# EAGLE board 2xBoard (EAGLE 9.2.2)
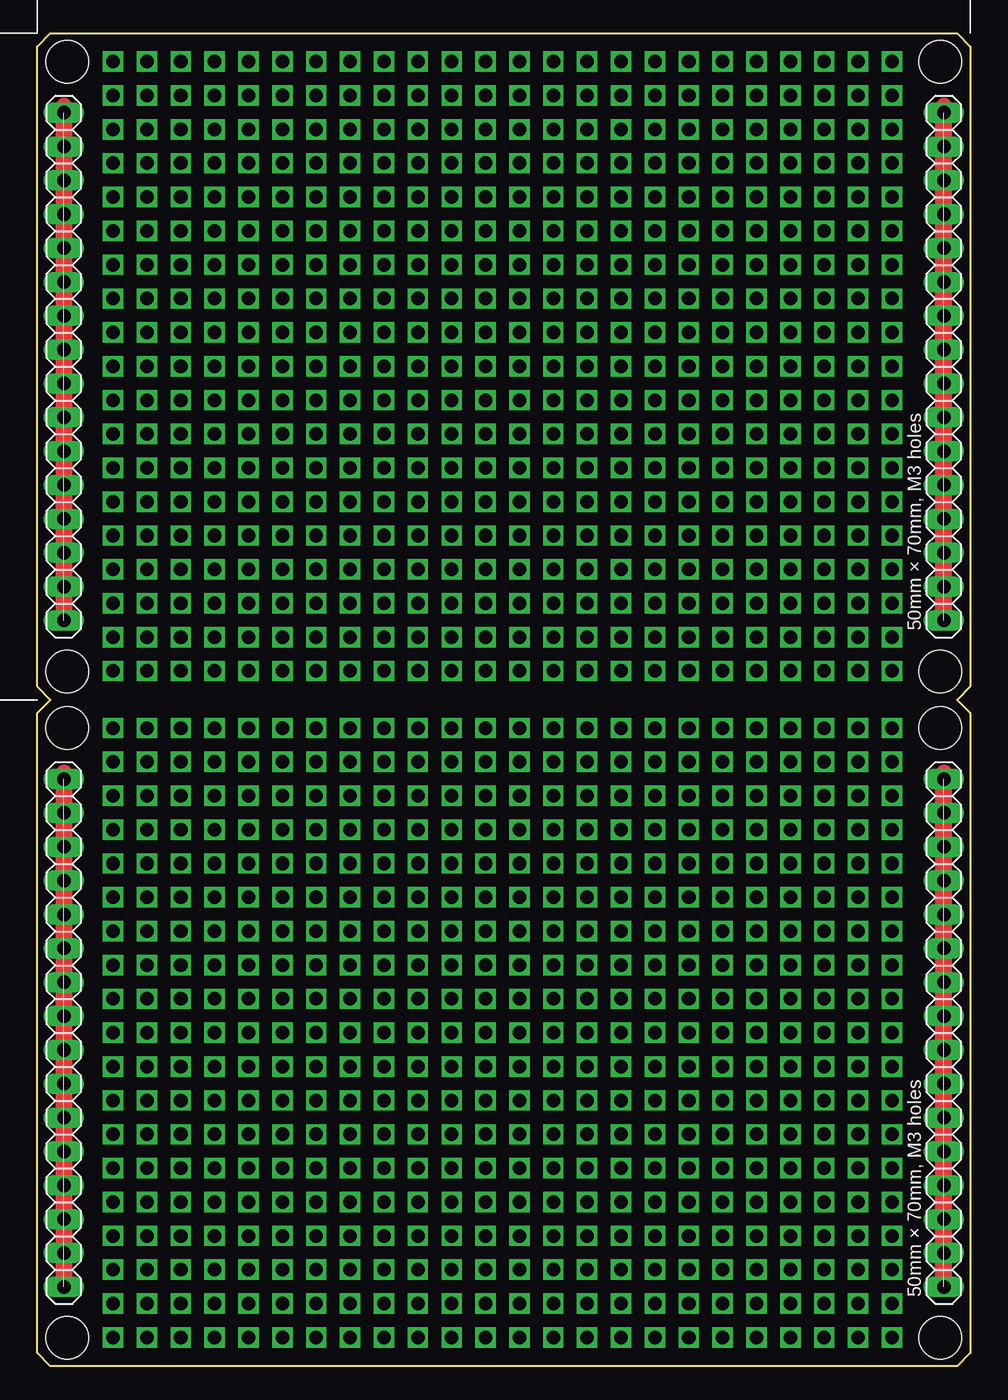
[diagram p0: board, top side]
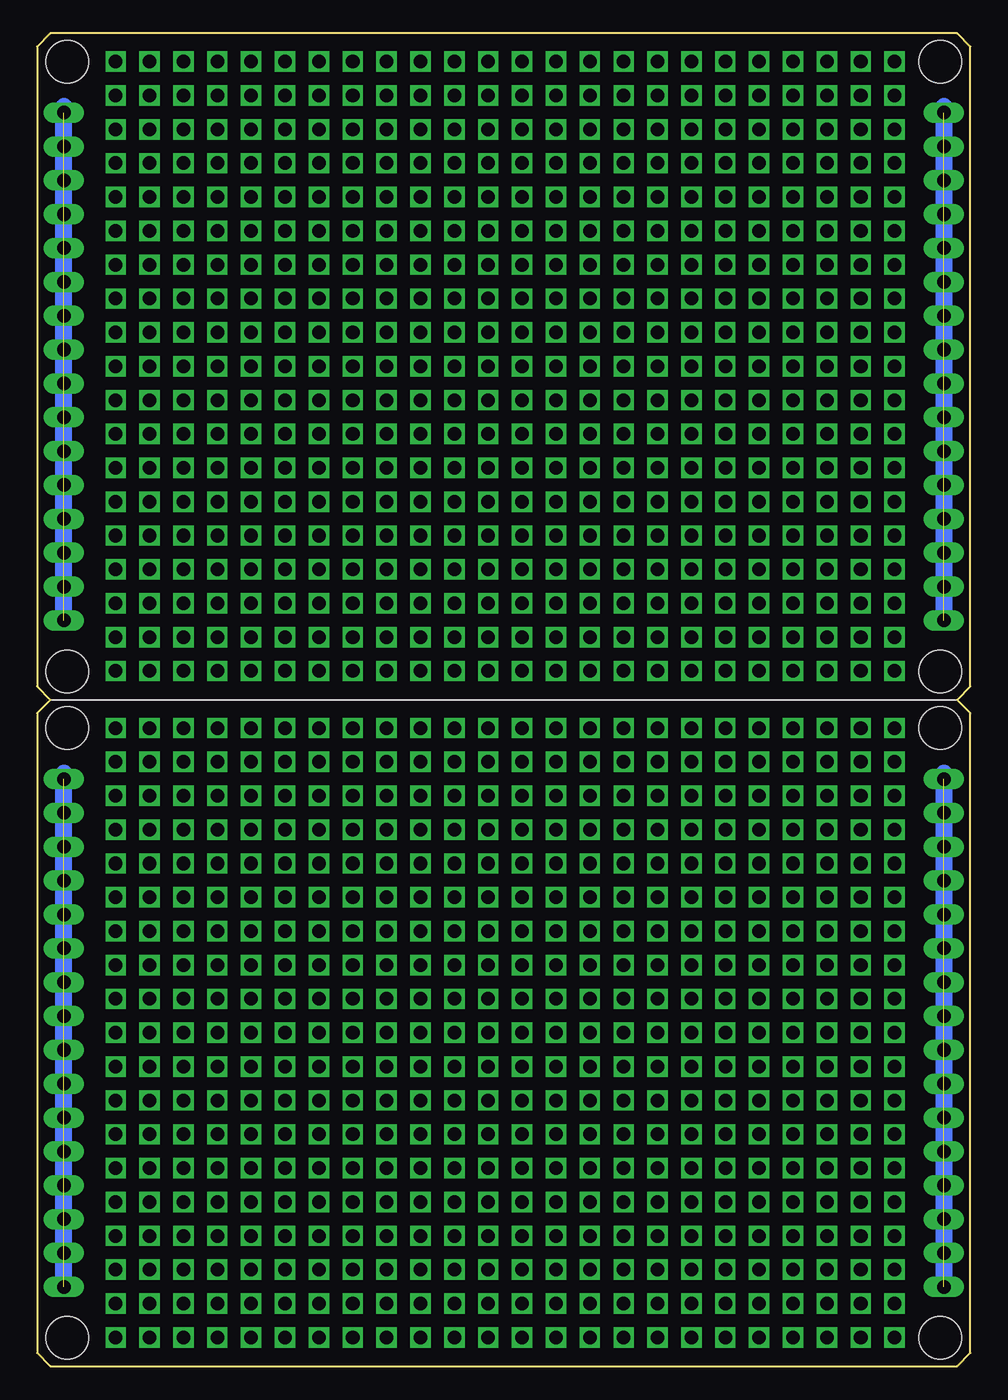
[diagram p1: board, bottom side, seen from below]

Size 70 x 100 mm. Coordinates in mm from the lower left corner, seen from the top.
Outline: 0,51 0,99 1,100 69,100 70,99 70,51 69,50 70,49 70,1 69,0 1,0 0,1 0,49 1,50 0,51
Copper layers (1*16): Top 0.035mm / dielectric 1.5mm / Bottom 0.035mm
Design rules "default *": minimum track width 6mil, minimum drill 0.35mm, track to track 6mil, track to pad 6mil, pad to pad 6mil, via to via 6mil, smd to smd 6mil, copper to edge 10mil, drill to drill 6mil, minimum pad ring 10mil, minimum via ring 8mil, stop-mask expansion 4mil, vias tented up to drill 0mil, thermal gap 10mil
Net classes: 0 default: width 0.305 mm; 1 thick: width 1.27 mm
Holes 3.2 mm at 67.75,97.87 67.75,52.13 2.25,97.87 2.25,52.13 67.75,47.87 67.75,2.13 2.25,47.87 2.25,2.13

## Footprints (pad centres in the part's own frame; a part is rotated, then mirrored left to right if it is on the bottom)
1X16 = drill 1.016 long: 1 -19.05,0; 2 -16.51,0; 3 -13.97,0; 4 -11.43,0; 5 -8.89,0; 6 -6.35,0; 7 -3.81,0; 8 -1.27,0; 9 1.27,0; 10 3.81,0; 11 6.35,0; 12 8.89,0; 13 11.43,0; 14 13.97,0; 15 16.51,0; 16 19.05,0

## Placement (x,y rotation side)
JP1  [1X16]  68,25 90 top
JP2  [1X16]  2,25 90 top
JP3  [1X16]  68,75 90 top
JP4  [1X16]  2,75 90 top

## Library data of the parts
JP1-JP4 = pinhead_v2

## Nets
SIDE1 [thick]: JP4.1 JP4.2 JP4.3 JP4.4 JP4.5 JP4.6 JP4.7 JP4.8 JP4.9 JP4.10 JP4.11 JP4.12 JP4.13 JP4.14 JP4.15 JP4.16
SIDE2 [thick]: JP3.1 JP3.2 JP3.3 JP3.4 JP3.5 JP3.6 JP3.7 JP3.8 JP3.9 JP3.10 JP3.11 JP3.12 JP3.13 JP3.14 JP3.15 JP3.16
SIDE3 [thick]: JP2.1 JP2.2 JP2.3 JP2.4 JP2.5 JP2.6 JP2.7 JP2.8 JP2.9 JP2.10 JP2.11 JP2.12 JP2.13 JP2.14 JP2.15 JP2.16
SIDE4 [thick]: JP1.1 JP1.2 JP1.3 JP1.4 JP1.5 JP1.6 JP1.7 JP1.8 JP1.9 JP1.10 JP1.11 JP1.12 JP1.13 JP1.14 JP1.15 JP1.16

## Tracks (layer width: path | path; a pad name or v marks a point on that pad's centre or on a via)
S$1
  Top 1.27: 2,94.5 2,56.5
S$2
  Top 1.27: 68,56.5 68,94.5
S$3
  Bottom 1.27: 2,94.5 2,56.5
S$4
  Bottom 1.27: 68,56.5 68,94.5
S$5  (via drill 1.02)
  other vias: 5.69,97.88
S$6  (via drill 1.02)
  other vias: 5.69,95.34
S$7  (via drill 1.02)
  other vias: 5.69,92.8
S$8  (via drill 1.02)
  other vias: 5.69,90.26
S$9  (via drill 1.02)
  other vias: 5.69,87.72
S$10  (via drill 1.02)
  other vias: 5.69,85.18
S$11  (via drill 1.02)
  other vias: 5.69,82.64
S$12  (via drill 1.02)
  other vias: 5.69,80.1
S$13  (via drill 1.02)
  other vias: 5.69,77.56
S$14  (via drill 1.02)
  other vias: 5.69,75.02
S$15  (via drill 1.02)
  other vias: 5.69,72.48
S$16  (via drill 1.02)
  other vias: 5.69,69.94
S$17  (via drill 1.02)
  other vias: 5.69,67.4
S$18  (via drill 1.02)
  other vias: 5.69,64.86
S$19  (via drill 1.02)
  other vias: 5.69,62.32
S$20  (via drill 1.02)
  other vias: 5.69,59.78
S$21  (via drill 1.02)
  other vias: 5.69,57.24
S$22  (via drill 1.02)
  other vias: 5.69,54.7
S$23  (via drill 1.02)
  other vias: 5.69,52.16
S$24  (via drill 1.02)
  other vias: 8.23,97.88
S$25  (via drill 1.02)
  other vias: 8.23,95.34
S$26  (via drill 1.02)
  other vias: 8.23,92.8
S$27  (via drill 1.02)
  other vias: 8.23,90.26
S$28  (via drill 1.02)
  other vias: 8.23,87.72
S$29  (via drill 1.02)
  other vias: 8.23,85.18
S$30  (via drill 1.02)
  other vias: 8.23,82.64
S$31  (via drill 1.02)
  other vias: 8.23,80.1
S$32  (via drill 1.02)
  other vias: 8.23,77.56
S$33  (via drill 1.02)
  other vias: 8.23,75.02
S$34  (via drill 1.02)
  other vias: 8.23,72.48
S$35  (via drill 1.02)
  other vias: 8.23,69.94
S$36  (via drill 1.02)
  other vias: 8.23,67.4
S$37  (via drill 1.02)
  other vias: 8.23,64.86
S$38  (via drill 1.02)
  other vias: 8.23,62.32
S$39  (via drill 1.02)
  other vias: 8.23,59.78
S$40  (via drill 1.02)
  other vias: 8.23,57.24
S$41  (via drill 1.02)
  other vias: 8.23,54.7
S$42  (via drill 1.02)
  other vias: 8.23,52.16
S$43  (via drill 1.02)
  other vias: 10.77,97.88
S$44  (via drill 1.02)
  other vias: 10.77,95.34
S$45  (via drill 1.02)
  other vias: 10.77,92.8
S$46  (via drill 1.02)
  other vias: 10.77,90.26
S$47  (via drill 1.02)
  other vias: 10.77,87.72
S$48  (via drill 1.02)
  other vias: 10.77,85.18
S$49  (via drill 1.02)
  other vias: 10.77,82.64
S$50  (via drill 1.02)
  other vias: 10.77,80.1
S$51  (via drill 1.02)
  other vias: 10.77,77.56
S$52  (via drill 1.02)
  other vias: 10.77,75.02
S$53  (via drill 1.02)
  other vias: 10.77,72.48
S$54  (via drill 1.02)
  other vias: 10.77,69.94
S$55  (via drill 1.02)
  other vias: 10.77,67.4
S$56  (via drill 1.02)
  other vias: 10.77,64.86
S$57  (via drill 1.02)
  other vias: 10.77,62.32
S$58  (via drill 1.02)
  other vias: 10.77,59.78
S$59  (via drill 1.02)
  other vias: 10.77,57.24
S$60  (via drill 1.02)
  other vias: 10.77,54.7
S$61  (via drill 1.02)
  other vias: 10.77,52.16
S$62  (via drill 1.02)
  other vias: 13.31,97.88
S$63  (via drill 1.02)
  other vias: 13.31,95.34
S$64  (via drill 1.02)
  other vias: 13.31,92.8
S$65  (via drill 1.02)
  other vias: 13.31,90.26
S$66  (via drill 1.02)
  other vias: 13.31,87.72
S$67  (via drill 1.02)
  other vias: 13.31,85.18
S$68  (via drill 1.02)
  other vias: 13.31,82.64
S$69  (via drill 1.02)
  other vias: 13.31,80.1
S$70  (via drill 1.02)
  other vias: 13.31,77.56
S$71  (via drill 1.02)
  other vias: 13.31,75.02
S$72  (via drill 1.02)
  other vias: 13.31,72.48
S$73  (via drill 1.02)
  other vias: 13.31,69.94
S$74  (via drill 1.02)
  other vias: 13.31,67.4
S$75  (via drill 1.02)
  other vias: 13.31,64.86
S$76  (via drill 1.02)
  other vias: 13.31,62.32
S$77  (via drill 1.02)
  other vias: 13.31,59.78
S$78  (via drill 1.02)
  other vias: 13.31,57.24
S$79  (via drill 1.02)
  other vias: 13.31,54.7
S$80  (via drill 1.02)
  other vias: 13.31,52.16
S$81  (via drill 1.02)
  other vias: 15.85,97.88
S$82  (via drill 1.02)
  other vias: 15.85,95.34
S$83  (via drill 1.02)
  other vias: 15.85,92.8
S$84  (via drill 1.02)
  other vias: 15.85,90.26
S$85  (via drill 1.02)
  other vias: 15.85,87.72
S$86  (via drill 1.02)
  other vias: 15.85,85.18
S$87  (via drill 1.02)
  other vias: 15.85,82.64
S$88  (via drill 1.02)
  other vias: 15.85,80.1
S$89  (via drill 1.02)
  other vias: 15.85,77.56
S$90  (via drill 1.02)
  other vias: 15.85,75.02
S$91  (via drill 1.02)
  other vias: 15.85,72.48
S$92  (via drill 1.02)
  other vias: 15.85,69.94
S$93  (via drill 1.02)
  other vias: 15.85,67.4
S$94  (via drill 1.02)
  other vias: 15.85,64.86
S$95  (via drill 1.02)
  other vias: 15.85,62.32
S$96  (via drill 1.02)
  other vias: 15.85,59.78
S$97  (via drill 1.02)
  other vias: 15.85,57.24
S$98  (via drill 1.02)
  other vias: 15.85,54.7
S$99  (via drill 1.02)
  other vias: 15.85,52.16
S$100  (via drill 1.02)
  other vias: 18.39,97.88
S$101  (via drill 1.02)
  other vias: 18.39,95.34
S$102  (via drill 1.02)
  other vias: 18.39,92.8
S$103  (via drill 1.02)
  other vias: 18.39,90.26
S$104  (via drill 1.02)
  other vias: 18.39,87.72
S$105  (via drill 1.02)
  other vias: 18.39,85.18
S$106  (via drill 1.02)
  other vias: 18.39,82.64
S$107  (via drill 1.02)
  other vias: 18.39,80.1
S$108  (via drill 1.02)
  other vias: 18.39,77.56
S$109  (via drill 1.02)
  other vias: 18.39,75.02
S$110  (via drill 1.02)
  other vias: 18.39,72.48
S$111  (via drill 1.02)
  other vias: 18.39,69.94
S$112  (via drill 1.02)
  other vias: 18.39,67.4
S$113  (via drill 1.02)
  other vias: 18.39,64.86
S$114  (via drill 1.02)
  other vias: 18.39,62.32
S$115  (via drill 1.02)
  other vias: 18.39,59.78
S$116  (via drill 1.02)
  other vias: 18.39,57.24
S$117  (via drill 1.02)
  other vias: 18.39,54.7
S$118  (via drill 1.02)
  other vias: 18.39,52.16
S$119  (via drill 1.02)
  other vias: 20.93,97.88
S$120  (via drill 1.02)
  other vias: 20.93,95.34
S$121  (via drill 1.02)
  other vias: 20.93,92.8
S$122  (via drill 1.02)
  other vias: 20.93,90.26
S$123  (via drill 1.02)
  other vias: 20.93,87.72
S$124  (via drill 1.02)
  other vias: 20.93,85.18
S$125  (via drill 1.02)
  other vias: 20.93,82.64
S$126  (via drill 1.02)
  other vias: 20.93,80.1
S$127  (via drill 1.02)
  other vias: 20.93,77.56
S$128  (via drill 1.02)
  other vias: 20.93,75.02
S$129  (via drill 1.02)
  other vias: 20.93,72.48
S$130  (via drill 1.02)
  other vias: 20.93,69.94
S$131  (via drill 1.02)
  other vias: 20.93,67.4
S$132  (via drill 1.02)
  other vias: 20.93,64.86
S$133  (via drill 1.02)
  other vias: 20.93,62.32
S$134  (via drill 1.02)
  other vias: 20.93,59.78
S$135  (via drill 1.02)
  other vias: 20.93,57.24
S$136  (via drill 1.02)
  other vias: 20.93,54.7
S$137  (via drill 1.02)
  other vias: 20.93,52.16
S$138  (via drill 1.02)
  other vias: 23.47,97.88
S$139  (via drill 1.02)
  other vias: 23.47,95.34
S$140  (via drill 1.02)
  other vias: 23.47,92.8
S$141  (via drill 1.02)
  other vias: 23.47,90.26
S$142  (via drill 1.02)
  other vias: 23.47,87.72
S$143  (via drill 1.02)
  other vias: 23.47,85.18
S$144  (via drill 1.02)
  other vias: 23.47,82.64
S$145  (via drill 1.02)
  other vias: 23.47,80.1
S$146  (via drill 1.02)
  other vias: 23.47,77.56
S$147  (via drill 1.02)
  other vias: 23.47,75.02
S$148  (via drill 1.02)
  other vias: 23.47,72.48
S$149  (via drill 1.02)
  other vias: 23.47,69.94
S$150  (via drill 1.02)
  other vias: 23.47,67.4
S$151  (via drill 1.02)
  other vias: 23.47,64.86
S$152  (via drill 1.02)
  other vias: 23.47,62.32
S$153  (via drill 1.02)
  other vias: 23.47,59.78
S$154  (via drill 1.02)
  other vias: 23.47,57.24
S$155  (via drill 1.02)
  other vias: 23.47,54.7
S$156  (via drill 1.02)
  other vias: 23.47,52.16
S$157  (via drill 1.02)
  other vias: 26.01,97.88
S$158  (via drill 1.02)
  other vias: 26.01,95.34
S$159  (via drill 1.02)
  other vias: 26.01,92.8
S$160  (via drill 1.02)
  other vias: 26.01,90.26
S$161  (via drill 1.02)
  other vias: 26.01,87.72
S$162  (via drill 1.02)
  other vias: 26.01,85.18
S$163  (via drill 1.02)
  other vias: 26.01,82.64
S$164  (via drill 1.02)
  other vias: 26.01,80.1
S$165  (via drill 1.02)
  other vias: 26.01,77.56
S$166  (via drill 1.02)
  other vias: 26.01,75.02
S$167  (via drill 1.02)
  other vias: 26.01,72.48
S$168  (via drill 1.02)
  other vias: 26.01,69.94
S$169  (via drill 1.02)
  other vias: 26.01,67.4
S$170  (via drill 1.02)
  other vias: 26.01,64.86
S$171  (via drill 1.02)
  other vias: 26.01,62.32
S$172  (via drill 1.02)
  other vias: 26.01,59.78
S$173  (via drill 1.02)
  other vias: 26.01,57.24
S$174  (via drill 1.02)
  other vias: 26.01,54.7
S$175  (via drill 1.02)
  other vias: 26.01,52.16
S$176  (via drill 1.02)
  other vias: 28.55,97.88
S$177  (via drill 1.02)
  other vias: 28.55,95.34
S$178  (via drill 1.02)
  other vias: 28.55,92.8
S$179  (via drill 1.02)
  other vias: 28.55,90.26
S$180  (via drill 1.02)
  other vias: 28.55,87.72
S$181  (via drill 1.02)
  other vias: 28.55,85.18
S$182  (via drill 1.02)
  other vias: 28.55,82.64
S$183  (via drill 1.02)
  other vias: 28.55,80.1
S$184  (via drill 1.02)
  other vias: 28.55,77.56
S$185  (via drill 1.02)
  other vias: 28.55,75.02
S$186  (via drill 1.02)
  other vias: 28.55,72.48
S$187  (via drill 1.02)
  other vias: 28.55,69.94
S$188  (via drill 1.02)
  other vias: 28.55,67.4
S$189  (via drill 1.02)
  other vias: 28.55,64.86
S$190  (via drill 1.02)
  other vias: 28.55,62.32
S$191  (via drill 1.02)
  other vias: 28.55,59.78
S$192  (via drill 1.02)
  other vias: 28.55,57.24
S$193  (via drill 1.02)
  other vias: 28.55,54.7
S$194  (via drill 1.02)
  other vias: 28.55,52.16
S$195  (via drill 1.02)
  other vias: 33.63,97.88
S$196  (via drill 1.02)
  other vias: 33.63,95.34
S$197  (via drill 1.02)
  other vias: 33.63,92.8
S$198  (via drill 1.02)
  other vias: 33.63,90.26
S$199  (via drill 1.02)
  other vias: 33.63,87.72
S$200  (via drill 1.02)
  other vias: 33.63,85.18
S$201  (via drill 1.02)
  other vias: 33.63,82.64
S$202  (via drill 1.02)
  other vias: 33.63,80.1
S$203  (via drill 1.02)
  other vias: 33.63,77.56
S$204  (via drill 1.02)
  other vias: 33.63,75.02
S$205  (via drill 1.02)
  other vias: 33.63,72.48
S$206  (via drill 1.02)
  other vias: 33.63,69.94
S$207  (via drill 1.02)
  other vias: 33.63,67.4
S$208  (via drill 1.02)
  other vias: 33.63,64.86
S$209  (via drill 1.02)
  other vias: 33.63,62.32
S$210  (via drill 1.02)
  other vias: 33.63,59.78
S$211  (via drill 1.02)
  other vias: 33.63,57.24
S$212  (via drill 1.02)
  other vias: 33.63,54.7
S$213  (via drill 1.02)
  other vias: 33.63,52.16
S$214  (via drill 1.02)
  other vias: 31.09,97.88
S$215  (via drill 1.02)
  other vias: 31.09,95.34
S$216  (via drill 1.02)
  other vias: 31.09,92.8
S$217  (via drill 1.02)
  other vias: 31.09,90.26
S$218  (via drill 1.02)
  other vias: 31.09,87.72
S$219  (via drill 1.02)
  other vias: 31.09,85.18
S$220  (via drill 1.02)
  other vias: 31.09,82.64
S$221  (via drill 1.02)
  other vias: 31.09,80.1
S$222  (via drill 1.02)
  other vias: 31.09,77.56
S$223  (via drill 1.02)
  other vias: 31.09,75.02
S$224  (via drill 1.02)
  other vias: 31.09,72.48
S$225  (via drill 1.02)
  other vias: 31.09,69.94
S$226  (via drill 1.02)
  other vias: 31.09,67.4
S$227  (via drill 1.02)
  other vias: 31.09,64.86
S$228  (via drill 1.02)
  other vias: 31.09,62.32
S$229  (via drill 1.02)
  other vias: 31.09,59.78
S$230  (via drill 1.02)
  other vias: 31.09,57.24
S$231  (via drill 1.02)
  other vias: 31.09,54.7
S$232  (via drill 1.02)
  other vias: 31.09,52.16
S$233  (via drill 1.02)
  other vias: 36.17,97.88
S$234  (via drill 1.02)
  other vias: 36.17,95.34
S$235  (via drill 1.02)
  other vias: 36.17,92.8
S$236  (via drill 1.02)
  other vias: 36.17,90.26
S$237  (via drill 1.02)
  other vias: 36.17,87.72
S$238  (via drill 1.02)
  other vias: 36.17,85.18
S$239  (via drill 1.02)
  other vias: 36.17,82.64
S$240  (via drill 1.02)
  other vias: 36.17,80.1
S$241  (via drill 1.02)
  other vias: 36.17,77.56
S$242  (via drill 1.02)
  other vias: 36.17,75.02
S$243  (via drill 1.02)
  other vias: 36.17,72.48
S$244  (via drill 1.02)
  other vias: 36.17,69.94
S$245  (via drill 1.02)
  other vias: 36.17,67.4
S$246  (via drill 1.02)
  other vias: 36.17,64.86
S$247  (via drill 1.02)
  other vias: 36.17,62.32
S$248  (via drill 1.02)
  other vias: 36.17,59.78
S$249  (via drill 1.02)
  other vias: 36.17,57.24
S$250  (via drill 1.02)
  other vias: 36.17,54.7
S$251  (via drill 1.02)
  other vias: 36.17,52.16
S$252  (via drill 1.02)
  other vias: 41.25,97.88
S$253  (via drill 1.02)
  other vias: 41.25,95.34
S$254  (via drill 1.02)
  other vias: 41.25,92.8
S$255  (via drill 1.02)
  other vias: 41.25,90.26
S$256  (via drill 1.02)
  other vias: 41.25,87.72
S$257  (via drill 1.02)
  other vias: 41.25,85.18
S$258  (via drill 1.02)
  other vias: 41.25,82.64
S$259  (via drill 1.02)
  other vias: 41.25,80.1
S$260  (via drill 1.02)
  other vias: 41.25,77.56
S$261  (via drill 1.02)
  other vias: 41.25,75.02
S$262  (via drill 1.02)
  other vias: 41.25,72.48
S$263  (via drill 1.02)
  other vias: 41.25,69.94
S$264  (via drill 1.02)
  other vias: 41.25,67.4
S$265  (via drill 1.02)
  other vias: 41.25,64.86
S$266  (via drill 1.02)
  other vias: 41.25,62.32
S$267  (via drill 1.02)
  other vias: 41.25,59.78
S$268  (via drill 1.02)
  other vias: 41.25,57.24
S$269  (via drill 1.02)
  other vias: 41.25,54.7
S$270  (via drill 1.02)
  other vias: 41.25,52.16
S$271  (via drill 1.02)
  other vias: 38.71,97.88
S$272  (via drill 1.02)
  other vias: 38.71,95.34
S$273  (via drill 1.02)
  other vias: 38.71,92.8
S$274  (via drill 1.02)
  other vias: 38.71,90.26
S$275  (via drill 1.02)
  other vias: 38.71,87.72
S$276  (via drill 1.02)
  other vias: 38.71,85.18
S$277  (via drill 1.02)
  other vias: 38.71,82.64
S$278  (via drill 1.02)
  other vias: 38.71,80.1
S$279  (via drill 1.02)
  other vias: 38.71,77.56
S$280  (via drill 1.02)
  other vias: 38.71,75.02
S$281  (via drill 1.02)
  other vias: 38.71,72.48
S$282  (via drill 1.02)
  other vias: 38.71,69.94
S$283  (via drill 1.02)
  other vias: 38.71,67.4
S$284  (via drill 1.02)
  other vias: 38.71,64.86
S$285  (via drill 1.02)
  other vias: 38.71,62.32
S$286  (via drill 1.02)
  other vias: 38.71,59.78
S$287  (via drill 1.02)
  other vias: 38.71,57.24
S$288  (via drill 1.02)
  other vias: 38.71,54.7
S$289  (via drill 1.02)
  other vias: 38.71,52.16
S$290  (via drill 1.02)
  other vias: 43.79,97.88
S$291  (via drill 1.02)
  other vias: 43.79,95.34
S$292  (via drill 1.02)
  other vias: 43.79,92.8
S$293  (via drill 1.02)
  other vias: 43.79,90.26
S$294  (via drill 1.02)
  other vias: 43.79,87.72
S$295  (via drill 1.02)
  other vias: 43.79,85.18
S$296  (via drill 1.02)
  other vias: 43.79,82.64
S$297  (via drill 1.02)
  other vias: 43.79,80.1
S$298  (via drill 1.02)
  other vias: 43.79,77.56
S$299  (via drill 1.02)
  other vias: 43.79,75.02
S$300  (via drill 1.02)
  other vias: 43.79,72.48
S$301  (via drill 1.02)
  other vias: 43.79,69.94
S$302  (via drill 1.02)
  other vias: 43.79,67.4
S$303  (via drill 1.02)
  other vias: 43.79,64.86
S$304  (via drill 1.02)
  other vias: 43.79,62.32
S$305  (via drill 1.02)
  other vias: 43.79,59.78
S$306  (via drill 1.02)
  other vias: 43.79,57.24
S$307  (via drill 1.02)
  other vias: 43.79,54.7
S$308  (via drill 1.02)
  other vias: 43.79,52.16
S$309  (via drill 1.02)
  other vias: 48.87,97.88
S$310  (via drill 1.02)
  other vias: 48.87,95.34
S$311  (via drill 1.02)
  other vias: 48.87,92.8
S$312  (via drill 1.02)
  other vias: 48.87,90.26
S$313  (via drill 1.02)
  other vias: 48.87,87.72
S$314  (via drill 1.02)
  other vias: 48.87,85.18
S$315  (via drill 1.02)
  other vias: 48.87,82.64
S$316  (via drill 1.02)
  other vias: 48.87,80.1
S$317  (via drill 1.02)
  other vias: 48.87,77.56
S$318  (via drill 1.02)
  other vias: 48.87,75.02
S$319  (via drill 1.02)
  other vias: 48.87,72.48
S$320  (via drill 1.02)
  other vias: 48.87,69.94
S$321  (via drill 1.02)
  other vias: 48.87,67.4
S$322  (via drill 1.02)
  other vias: 48.87,64.86
S$323  (via drill 1.02)
  other vias: 48.87,62.32
S$324  (via drill 1.02)
  other vias: 48.87,59.78
S$325  (via drill 1.02)
  other vias: 48.87,57.24
S$326  (via drill 1.02)
  other vias: 48.87,54.7
S$327  (via drill 1.02)
  other vias: 48.87,52.16
S$328  (via drill 1.02)
  other vias: 46.33,97.88
S$329  (via drill 1.02)
  other vias: 46.33,95.34
S$330  (via drill 1.02)
  other vias: 46.33,92.8
S$331  (via drill 1.02)
  other vias: 46.33,90.26
S$332  (via drill 1.02)
  other vias: 46.33,87.72
S$333  (via drill 1.02)
  other vias: 46.33,85.18
S$334  (via drill 1.02)
  other vias: 46.33,82.64
S$335  (via drill 1.02)
  other vias: 46.33,80.1
S$336  (via drill 1.02)
  other vias: 46.33,77.56
S$337  (via drill 1.02)
  other vias: 46.33,75.02
S$338  (via drill 1.02)
  other vias: 46.33,72.48
S$339  (via drill 1.02)
  other vias: 46.33,69.94
S$340  (via drill 1.02)
  other vias: 46.33,67.4
S$341  (via drill 1.02)
  other vias: 46.33,64.86
S$342  (via drill 1.02)
  other vias: 46.33,62.32
S$343  (via drill 1.02)
  other vias: 46.33,59.78
S$344  (via drill 1.02)
  other vias: 46.33,57.24
S$345  (via drill 1.02)
  other vias: 46.33,54.7
S$346  (via drill 1.02)
  other vias: 46.33,52.16
S$347  (via drill 1.02)
  other vias: 51.41,97.88
S$348  (via drill 1.02)
  other vias: 51.41,95.34
S$349  (via drill 1.02)
  other vias: 51.41,92.8
S$350  (via drill 1.02)
  other vias: 51.41,90.26
S$351  (via drill 1.02)
  other vias: 51.41,87.72
S$352  (via drill 1.02)
  other vias: 51.41,85.18
S$353  (via drill 1.02)
  other vias: 51.41,82.64
S$354  (via drill 1.02)
  other vias: 51.41,80.1
S$355  (via drill 1.02)
  other vias: 51.41,77.56
S$356  (via drill 1.02)
  other vias: 51.41,75.02
S$357  (via drill 1.02)
  other vias: 51.41,72.48
S$358  (via drill 1.02)
  other vias: 51.41,69.94
S$359  (via drill 1.02)
  other vias: 51.41,67.4
S$360  (via drill 1.02)
  other vias: 51.41,64.86
S$361  (via drill 1.02)
  other vias: 51.41,62.32
S$362  (via drill 1.02)
  other vias: 51.41,59.78
S$363  (via drill 1.02)
  other vias: 51.41,57.24
S$364  (via drill 1.02)
  other vias: 51.41,54.7
S$365  (via drill 1.02)
  other vias: 51.41,52.16
S$366  (via drill 1.02)
  other vias: 53.95,97.88
S$367  (via drill 1.02)
  other vias: 53.95,95.34
S$368  (via drill 1.02)
  other vias: 53.95,92.8
S$369  (via drill 1.02)
  other vias: 53.95,90.26
S$370  (via drill 1.02)
  other vias: 53.95,87.72
S$371  (via drill 1.02)
  other vias: 53.95,85.18
S$372  (via drill 1.02)
  other vias: 53.95,82.64
S$373  (via drill 1.02)
  other vias: 53.95,80.1
S$374  (via drill 1.02)
  other vias: 53.95,77.56
S$375  (via drill 1.02)
  other vias: 53.95,75.02
S$376  (via drill 1.02)
  other vias: 53.95,72.48
S$377  (via drill 1.02)
  other vias: 53.95,69.94
S$378  (via drill 1.02)
  other vias: 53.95,67.4
S$379  (via drill 1.02)
  other vias: 53.95,64.86
S$380  (via drill 1.02)
  other vias: 53.95,62.32
S$381  (via drill 1.02)
  other vias: 53.95,59.78
S$382  (via drill 1.02)
  other vias: 53.95,57.24
S$383  (via drill 1.02)
  other vias: 53.95,54.7
S$384  (via drill 1.02)
  other vias: 53.95,52.16
S$385  (via drill 1.02)
  other vias: 56.49,97.88
S$386  (via drill 1.02)
  other vias: 56.49,95.34
S$387  (via drill 1.02)
  other vias: 56.49,92.8
S$388  (via drill 1.02)
  other vias: 56.49,90.26
S$389  (via drill 1.02)
  other vias: 56.49,87.72
S$390  (via drill 1.02)
  other vias: 56.49,85.18
S$391  (via drill 1.02)
  other vias: 56.49,82.64
S$392  (via drill 1.02)
  other vias: 56.49,80.1
S$393  (via drill 1.02)
  other vias: 56.49,77.56
S$394  (via drill 1.02)
  other vias: 56.49,75.02
S$395  (via drill 1.02)
  other vias: 56.49,72.48
S$396  (via drill 1.02)
  other vias: 56.49,69.94
S$397  (via drill 1.02)
  other vias: 56.49,67.4
S$398  (via drill 1.02)
  other vias: 56.49,64.86
S$399  (via drill 1.02)
  other vias: 56.49,62.32
S$400  (via drill 1.02)
  other vias: 56.49,59.78
S$401  (via drill 1.02)
  other vias: 56.49,57.24
S$402  (via drill 1.02)
  other vias: 56.49,54.7
S$403  (via drill 1.02)
  other vias: 56.49,52.16
S$404  (via drill 1.02)
  other vias: 59.03,97.88
S$405  (via drill 1.02)
  other vias: 59.03,95.34
S$406  (via drill 1.02)
  other vias: 59.03,92.8
S$407  (via drill 1.02)
  other vias: 59.03,90.26
S$408  (via drill 1.02)
  other vias: 59.03,87.72
S$409  (via drill 1.02)
  other vias: 59.03,85.18
S$410  (via drill 1.02)
  other vias: 59.03,82.64
S$411  (via drill 1.02)
  other vias: 59.03,80.1
S$412  (via drill 1.02)
  other vias: 59.03,77.56
S$413  (via drill 1.02)
  other vias: 59.03,75.02
S$414  (via drill 1.02)
  other vias: 59.03,72.48
S$415  (via drill 1.02)
  other vias: 59.03,69.94
S$416  (via drill 1.02)
  other vias: 59.03,67.4
S$417  (via drill 1.02)
  other vias: 59.03,64.86
S$418  (via drill 1.02)
  other vias: 59.03,62.32
S$419  (via drill 1.02)
  other vias: 59.03,59.78
S$420  (via drill 1.02)
  other vias: 59.03,57.24
S$421  (via drill 1.02)
  other vias: 59.03,54.7
S$422  (via drill 1.02)
  other vias: 59.03,52.16
S$423  (via drill 1.02)
  other vias: 61.57,97.88
S$424  (via drill 1.02)
  other vias: 61.57,95.34
S$425  (via drill 1.02)
  other vias: 61.57,92.8
S$426  (via drill 1.02)
  other vias: 61.57,90.26
S$427  (via drill 1.02)
  other vias: 61.57,87.72
S$428  (via drill 1.02)
  other vias: 61.57,85.18
S$429  (via drill 1.02)
  other vias: 61.57,82.64
S$430  (via drill 1.02)
  other vias: 61.57,80.1
S$431  (via drill 1.02)
  other vias: 61.57,77.56
S$432  (via drill 1.02)
  other vias: 61.57,75.02
S$433  (via drill 1.02)
  other vias: 61.57,72.48
S$434  (via drill 1.02)
  other vias: 61.57,69.94
S$435  (via drill 1.02)
  other vias: 61.57,67.4
S$436  (via drill 1.02)
  other vias: 61.57,64.86
S$437  (via drill 1.02)
  other vias: 61.57,62.32
S$438  (via drill 1.02)
  other vias: 61.57,59.78
S$439  (via drill 1.02)
  other vias: 61.57,57.24
S$440  (via drill 1.02)
  other vias: 61.57,54.7
S$441  (via drill 1.02)
  other vias: 61.57,52.16
S$442  (via drill 1.02)
  other vias: 64.11,97.88
S$443  (via drill 1.02)
  other vias: 64.11,95.34
S$444  (via drill 1.02)
  other vias: 64.11,92.8
S$445  (via drill 1.02)
  other vias: 64.11,90.26
S$446  (via drill 1.02)
  other vias: 64.11,87.72
S$447  (via drill 1.02)
  other vias: 64.11,85.18
S$448  (via drill 1.02)
  other vias: 64.11,82.64
S$449  (via drill 1.02)
  other vias: 64.11,80.1
S$450  (via drill 1.02)
  other vias: 64.11,77.56
S$451  (via drill 1.02)
  other vias: 64.11,75.02
S$452  (via drill 1.02)
  other vias: 64.11,72.48
S$453  (via drill 1.02)
  other vias: 64.11,69.94
S$454  (via drill 1.02)
  other vias: 64.11,67.4
S$455  (via drill 1.02)
  other vias: 64.11,64.86
S$456  (via drill 1.02)
  other vias: 64.11,62.32
S$457  (via drill 1.02)
  other vias: 64.11,59.78
S$458  (via drill 1.02)
  other vias: 64.11,57.24
S$459  (via drill 1.02)
  other vias: 64.11,54.7
S$460  (via drill 1.02)
  other vias: 64.11,52.16
S$461
  Top 1.27: 2,44.5 2,6.5
S$462
  Top 1.27: 68,6.5 68,44.5
S$463
  Bottom 1.27: 2,44.5 2,6.5
S$464
  Bottom 1.27: 68,6.5 68,44.5
S$465  (via drill 1.02)
  other vias: 5.69,47.88
S$466  (via drill 1.02)
  other vias: 5.69,45.34
S$467  (via drill 1.02)
  other vias: 5.69,42.8
S$468  (via drill 1.02)
  other vias: 5.69,40.26
S$469  (via drill 1.02)
  other vias: 5.69,37.72
S$470  (via drill 1.02)
  other vias: 5.69,35.18
S$471  (via drill 1.02)
  other vias: 5.69,32.64
S$472  (via drill 1.02)
  other vias: 5.69,30.1
S$473  (via drill 1.02)
  other vias: 5.69,27.56
S$474  (via drill 1.02)
  other vias: 5.69,25.02
S$475  (via drill 1.02)
  other vias: 5.69,22.48
S$476  (via drill 1.02)
  other vias: 5.69,19.94
S$477  (via drill 1.02)
  other vias: 5.69,17.4
S$478  (via drill 1.02)
  other vias: 5.69,14.86
S$479  (via drill 1.02)
  other vias: 5.69,12.32
S$480  (via drill 1.02)
  other vias: 5.69,9.78
S$481  (via drill 1.02)
  other vias: 5.69,7.24
S$482  (via drill 1.02)
  other vias: 5.69,4.7
S$483  (via drill 1.02)
  other vias: 5.69,2.16
S$484  (via drill 1.02)
  other vias: 8.23,47.88
S$485  (via drill 1.02)
  other vias: 8.23,45.34
S$486  (via drill 1.02)
  other vias: 8.23,42.8
S$487  (via drill 1.02)
  other vias: 8.23,40.26
S$488  (via drill 1.02)
  other vias: 8.23,37.72
S$489  (via drill 1.02)
  other vias: 8.23,35.18
S$490  (via drill 1.02)
  other vias: 8.23,32.64
S$491  (via drill 1.02)
  other vias: 8.23,30.1
S$492  (via drill 1.02)
  other vias: 8.23,27.56
S$493  (via drill 1.02)
  other vias: 8.23,25.02
S$494  (via drill 1.02)
  other vias: 8.23,22.48
S$495  (via drill 1.02)
  other vias: 8.23,19.94
S$496  (via drill 1.02)
  other vias: 8.23,17.4
S$497  (via drill 1.02)
  other vias: 8.23,14.86
S$498  (via drill 1.02)
  other vias: 8.23,12.32
S$499  (via drill 1.02)
  other vias: 8.23,9.78
S$500  (via drill 1.02)
  other vias: 8.23,7.24
S$501  (via drill 1.02)
  other vias: 8.23,4.7
S$502  (via drill 1.02)
  other vias: 8.23,2.16
S$503  (via drill 1.02)
  other vias: 10.77,47.88
S$504  (via drill 1.02)
  other vias: 10.77,45.34
S$505  (via drill 1.02)
  other vias: 10.77,42.8
S$506  (via drill 1.02)
  other vias: 10.77,40.26
S$507  (via drill 1.02)
  other vias: 10.77,37.72
S$508  (via drill 1.02)
  other vias: 10.77,35.18
S$509  (via drill 1.02)
  other vias: 10.77,32.64
S$510  (via drill 1.02)
  other vias: 10.77,30.1
S$511  (via drill 1.02)
  other vias: 10.77,27.56
S$512  (via drill 1.02)
  other vias: 10.77,25.02
S$513  (via drill 1.02)
  other vias: 10.77,22.48
S$514  (via drill 1.02)
  other vias: 10.77,19.94
S$515  (via drill 1.02)
  other vias: 10.77,17.4
S$516  (via drill 1.02)
  other vias: 10.77,14.86
S$517  (via drill 1.02)
  other vias: 10.77,12.32
S$518  (via drill 1.02)
  other vias: 10.77,9.78
S$519  (via drill 1.02)
  other vias: 10.77,7.24
S$520  (via drill 1.02)
  other vias: 10.77,4.7
S$521  (via drill 1.02)
  other vias: 10.77,2.16
S$522  (via drill 1.02)
  other vias: 13.31,47.88
S$523  (via drill 1.02)
  other vias: 13.31,45.34
S$524  (via drill 1.02)
  other vias: 13.31,42.8
S$525  (via drill 1.02)
  other vias: 13.31,40.26
S$526  (via drill 1.02)
  other vias: 13.31,37.72
S$527  (via drill 1.02)
  other vias: 13.31,35.18
S$528  (via drill 1.02)
  other vias: 13.31,32.64
S$529  (via drill 1.02)
  other vias: 13.31,30.1
S$530  (via drill 1.02)
  other vias: 13.31,27.56
S$531  (via drill 1.02)
  other vias: 13.31,25.02
S$532  (via drill 1.02)
  other vias: 13.31,22.48
S$533  (via drill 1.02)
  other vias: 13.31,19.94
S$534  (via drill 1.02)
  other vias: 13.31,17.4
S$535  (via drill 1.02)
  other vias: 13.31,14.86
S$536  (via drill 1.02)
  other vias: 13.31,12.32
S$537  (via drill 1.02)
  other vias: 13.31,9.78
S$538  (via drill 1.02)
  other vias: 13.31,7.24
S$539  (via drill 1.02)
  other vias: 13.31,4.7
S$540  (via drill 1.02)
  other vias: 13.31,2.16
S$541  (via drill 1.02)
  other vias: 15.85,47.88
S$542  (via drill 1.02)
  other vias: 15.85,45.34
S$543  (via drill 1.02)
  other vias: 15.85,42.8
S$544  (via drill 1.02)
  other vias: 15.85,40.26
S$545  (via drill 1.02)
  other vias: 15.85,37.72
S$546  (via drill 1.02)
  other vias: 15.85,35.18
S$547  (via drill 1.02)
  other vias: 15.85,32.64
S$548  (via drill 1.02)
  other vias: 15.85,30.1
S$549  (via drill 1.02)
  other vias: 15.85,27.56
S$550  (via drill 1.02)
  other vias: 15.85,25.02
S$551  (via drill 1.02)
  other vias: 15.85,22.48
S$552  (via drill 1.02)
  other vias: 15.85,19.94
S$553  (via drill 1.02)
  other vias: 15.85,17.4
S$554  (via drill 1.02)
  other vias: 15.85,14.86
S$555  (via drill 1.02)
  other vias: 15.85,12.32
S$556  (via drill 1.02)
  other vias: 15.85,9.78
S$557  (via drill 1.02)
  other vias: 15.85,7.24
S$558  (via drill 1.02)
  other vias: 15.85,4.7
S$559  (via drill 1.02)
  other vias: 15.85,2.16
S$560  (via drill 1.02)
  other vias: 18.39,47.88
S$561  (via drill 1.02)
  other vias: 18.39,45.34
S$562  (via drill 1.02)
  other vias: 18.39,42.8
S$563  (via drill 1.02)
  other vias: 18.39,40.26
S$564  (via drill 1.02)
  other vias: 18.39,37.72
S$565  (via drill 1.02)
  other vias: 18.39,35.18
S$566  (via drill 1.02)
  other vias: 18.39,32.64
S$567  (via drill 1.02)
  other vias: 18.39,30.1
S$568  (via drill 1.02)
  other vias: 18.39,27.56
S$569  (via drill 1.02)
  other vias: 18.39,25.02
S$570  (via drill 1.02)
  other vias: 18.39,22.48
S$571  (via drill 1.02)
  other vias: 18.39,19.94
S$572  (via drill 1.02)
  other vias: 18.39,17.4
S$573  (via drill 1.02)
  other vias: 18.39,14.86
S$574  (via drill 1.02)
  other vias: 18.39,12.32
S$575  (via drill 1.02)
  other vias: 18.39,9.78
S$576  (via drill 1.02)
  other vias: 18.39,7.24
S$577  (via drill 1.02)
  other vias: 18.39,4.7
S$578  (via drill 1.02)
  other vias: 18.39,2.16
S$579  (via drill 1.02)
  other vias: 20.93,47.88
S$580  (via drill 1.02)
  other vias: 20.93,45.34
S$581  (via drill 1.02)
  other vias: 20.93,42.8
S$582  (via drill 1.02)
  other vias: 20.93,40.26
S$583  (via drill 1.02)
  other vias: 20.93,37.72
S$584  (via drill 1.02)
  other vias: 20.93,35.18
S$585  (via drill 1.02)
  other vias: 20.93,32.64
S$586  (via drill 1.02)
  other vias: 20.93,30.1
S$587  (via drill 1.02)
  other vias: 20.93,27.56
S$588  (via drill 1.02)
  other vias: 20.93,25.02
S$589  (via drill 1.02)
  other vias: 20.93,22.48
S$590  (via drill 1.02)
  other vias: 20.93,19.94
S$591  (via drill 1.02)
  other vias: 20.93,17.4
S$592  (via drill 1.02)
  other vias: 20.93,14.86
S$593  (via drill 1.02)
  other vias: 20.93,12.32
S$594  (via drill 1.02)
  other vias: 20.93,9.78
S$595  (via drill 1.02)
  other vias: 20.93,7.24
S$596  (via drill 1.02)
  other vias: 20.93,4.7
S$597  (via drill 1.02)
  other vias: 20.93,2.16
S$598  (via drill 1.02)
  other vias: 23.47,47.88
S$599  (via drill 1.02)
  other vias: 23.47,45.34
S$600  (via drill 1.02)
  other vias: 23.47,42.8
S$601  (via drill 1.02)
  other vias: 23.47,40.26
S$602  (via drill 1.02)
  other vias: 23.47,37.72
S$603  (via drill 1.02)
  other vias: 23.47,35.18
S$604  (via drill 1.02)
  other vias: 23.47,32.64
S$605  (via drill 1.02)
  other vias: 23.47,30.1
S$606  (via drill 1.02)
  other vias: 23.47,27.56
S$607  (via drill 1.02)
  other vias: 23.47,25.02
S$608  (via drill 1.02)
  other vias: 23.47,22.48
S$609  (via drill 1.02)
  other vias: 23.47,19.94
S$610  (via drill 1.02)
  other vias: 23.47,17.4
S$611  (via drill 1.02)
  other vias: 23.47,14.86
S$612  (via drill 1.02)
  other vias: 23.47,12.32
S$613  (via drill 1.02)
  other vias: 23.47,9.78
S$614  (via drill 1.02)
  other vias: 23.47,7.24
S$615  (via drill 1.02)
  other vias: 23.47,4.7
S$616  (via drill 1.02)
  other vias: 23.47,2.16
S$617  (via drill 1.02)
  other vias: 26.01,47.88
S$618  (via drill 1.02)
  other vias: 26.01,45.34
S$619  (via drill 1.02)
  other vias: 26.01,42.8
S$620  (via drill 1.02)
  other vias: 26.01,40.26
S$621  (via drill 1.02)
  other vias: 26.01,37.72
S$622  (via drill 1.02)
  other vias: 26.01,35.18
S$623  (via drill 1.02)
  other vias: 26.01,32.64
S$624  (via drill 1.02)
  other vias: 26.01,30.1
S$625  (via drill 1.02)
  other vias: 26.01,27.56
S$626  (via drill 1.02)
  other vias: 26.01,25.02
S$627  (via drill 1.02)
  other vias: 26.01,22.48
S$628  (via drill 1.02)
  other vias: 26.01,19.94
S$629  (via drill 1.02)
  other vias: 26.01,17.4
S$630  (via drill 1.02)
  other vias: 26.01,14.86
S$631  (via drill 1.02)
  other vias: 26.01,12.32
S$632  (via drill 1.02)
  other vias: 26.01,9.78
S$633  (via drill 1.02)
  other vias: 26.01,7.24
S$634  (via drill 1.02)
  other vias: 26.01,4.7
S$635  (via drill 1.02)
  other vias: 26.01,2.16
S$636  (via drill 1.02)
  other vias: 28.55,47.88
S$637  (via drill 1.02)
  other vias: 28.55,45.34
S$638  (via drill 1.02)
  other vias: 28.55,42.8
S$639  (via drill 1.02)
  other vias: 28.55,40.26
S$640  (via drill 1.02)
  other vias: 28.55,37.72
S$641  (via drill 1.02)
  other vias: 28.55,35.18
S$642  (via drill 1.02)
  other vias: 28.55,32.64
S$643  (via drill 1.02)
  other vias: 28.55,30.1
S$644  (via drill 1.02)
  other vias: 28.55,27.56
S$645  (via drill 1.02)
  other vias: 28.55,25.02
S$646  (via drill 1.02)
  other vias: 28.55,22.48
S$647  (via drill 1.02)
  other vias: 28.55,19.94
S$648  (via drill 1.02)
  other vias: 28.55,17.4
S$649  (via drill 1.02)
  other vias: 28.55,14.86
S$650  (via drill 1.02)
  other vias: 28.55,12.32
S$651  (via drill 1.02)
  other vias: 28.55,9.78
S$652  (via drill 1.02)
  other vias: 28.55,7.24
S$653  (via drill 1.02)
  other vias: 28.55,4.7
S$654  (via drill 1.02)
  other vias: 28.55,2.16
S$655  (via drill 1.02)
  other vias: 33.63,47.88
S$656  (via drill 1.02)
  other vias: 33.63,45.34
S$657  (via drill 1.02)
  other vias: 33.63,42.8
S$658  (via drill 1.02)
  other vias: 33.63,40.26
S$659  (via drill 1.02)
  other vias: 33.63,37.72
S$660  (via drill 1.02)
  other vias: 33.63,35.18
S$661  (via drill 1.02)
  other vias: 33.63,32.64
S$662  (via drill 1.02)
  other vias: 33.63,30.1
S$663  (via drill 1.02)
  other vias: 33.63,27.56
S$664  (via drill 1.02)
  other vias: 33.63,25.02
S$665  (via drill 1.02)
  other vias: 33.63,22.48
S$666  (via drill 1.02)
  other vias: 33.63,19.94
S$667  (via drill 1.02)
  other vias: 33.63,17.4
S$668  (via drill 1.02)
  other vias: 33.63,14.86
S$669  (via drill 1.02)
  other vias: 33.63,12.32
S$670  (via drill 1.02)
  other vias: 33.63,9.78
S$671  (via drill 1.02)
  other vias: 33.63,7.24
S$672  (via drill 1.02)
  other vias: 33.63,4.7
S$673  (via drill 1.02)
  other vias: 33.63,2.16
S$674  (via drill 1.02)
  other vias: 31.09,47.88
S$675  (via drill 1.02)
  other vias: 31.09,45.34
S$676  (via drill 1.02)
  other vias: 31.09,42.8
S$677  (via drill 1.02)
  other vias: 31.09,40.26
S$678  (via drill 1.02)
  other vias: 31.09,37.72
S$679  (via drill 1.02)
  other vias: 31.09,35.18
S$680  (via drill 1.02)
  other vias: 31.09,32.64
S$681  (via drill 1.02)
  other vias: 31.09,30.1
S$682  (via drill 1.02)
  other vias: 31.09,27.56
S$683  (via drill 1.02)
  other vias: 31.09,25.02
S$684  (via drill 1.02)
  other vias: 31.09,22.48
S$685  (via drill 1.02)
  other vias: 31.09,19.94
S$686  (via drill 1.02)
  other vias: 31.09,17.4
S$687  (via drill 1.02)
  other vias: 31.09,14.86
S$688  (via drill 1.02)
  other vias: 31.09,12.32
S$689  (via drill 1.02)
  other vias: 31.09,9.78
S$690  (via drill 1.02)
  other vias: 31.09,7.24
S$691  (via drill 1.02)
  other vias: 31.09,4.7
S$692  (via drill 1.02)
  other vias: 31.09,2.16
S$693  (via drill 1.02)
  other vias: 36.17,47.88
S$694  (via drill 1.02)
  other vias: 36.17,45.34
S$695  (via drill 1.02)
  other vias: 36.17,42.8
S$696  (via drill 1.02)
  other vias: 36.17,40.26
S$697  (via drill 1.02)
  other vias: 36.17,37.72
S$698  (via drill 1.02)
  other vias: 36.17,35.18
S$699  (via drill 1.02)
  other vias: 36.17,32.64
S$700  (via drill 1.02)
  other vias: 36.17,30.1
S$701  (via drill 1.02)
  other vias: 36.17,27.56
S$702  (via drill 1.02)
  other vias: 36.17,25.02
S$703  (via drill 1.02)
  other vias: 36.17,22.48
S$704  (via drill 1.02)
  other vias: 36.17,19.94
S$705  (via drill 1.02)
  other vias: 36.17,17.4
S$706  (via drill 1.02)
  other vias: 36.17,14.86
S$707  (via drill 1.02)
  other vias: 36.17,12.32
S$708  (via drill 1.02)
  other vias: 36.17,9.78
S$709  (via drill 1.02)
  other vias: 36.17,7.24
S$710  (via drill 1.02)
  other vias: 36.17,4.7
S$711  (via drill 1.02)
  other vias: 36.17,2.16
S$712  (via drill 1.02)
  other vias: 41.25,47.88
S$713  (via drill 1.02)
  other vias: 41.25,45.34
S$714  (via drill 1.02)
  other vias: 41.25,42.8
S$715  (via drill 1.02)
  other vias: 41.25,40.26
S$716  (via drill 1.02)
  other vias: 41.25,37.72
S$717  (via drill 1.02)
  other vias: 41.25,35.18
S$718  (via drill 1.02)
  other vias: 41.25,32.64
S$719  (via drill 1.02)
  other vias: 41.25,30.1
S$720  (via drill 1.02)
  other vias: 41.25,27.56
S$721  (via drill 1.02)
  other vias: 41.25,25.02
S$722  (via drill 1.02)
  other vias: 41.25,22.48
S$723  (via drill 1.02)
  other vias: 41.25,19.94
S$724  (via drill 1.02)
  other vias: 41.25,17.4
S$725  (via drill 1.02)
  other vias: 41.25,14.86
S$726  (via drill 1.02)
  other vias: 41.25,12.32
S$727  (via drill 1.02)
  other vias: 41.25,9.78
S$728  (via drill 1.02)
  other vias: 41.25,7.24
S$729  (via drill 1.02)
  other vias: 41.25,4.7
S$730  (via drill 1.02)
  other vias: 41.25,2.16
S$731  (via drill 1.02)
  other vias: 38.71,47.88
S$732  (via drill 1.02)
  other vias: 38.71,45.34
S$733  (via drill 1.02)
  other vias: 38.71,42.8
S$734  (via drill 1.02)
  other vias: 38.71,40.26
S$735  (via drill 1.02)
  other vias: 38.71,37.72
S$736  (via drill 1.02)
  other vias: 38.71,35.18
S$737  (via drill 1.02)
  other vias: 38.71,32.64
S$738  (via drill 1.02)
  other vias: 38.71,30.1
S$739  (via drill 1.02)
  other vias: 38.71,27.56
S$740  (via drill 1.02)
  other vias: 38.71,25.02
S$741  (via drill 1.02)
  other vias: 38.71,22.48
S$742  (via drill 1.02)
  other vias: 38.71,19.94
S$743  (via drill 1.02)
  other vias: 38.71,17.4
S$744  (via drill 1.02)
  other vias: 38.71,14.86
S$745  (via drill 1.02)
  other vias: 38.71,12.32
S$746  (via drill 1.02)
  other vias: 38.71,9.78
S$747  (via drill 1.02)
  other vias: 38.71,7.24
S$748  (via drill 1.02)
  other vias: 38.71,4.7
S$749  (via drill 1.02)
  other vias: 38.71,2.16
S$750  (via drill 1.02)
  other vias: 43.79,47.88
S$751  (via drill 1.02)
  other vias: 43.79,45.34
S$752  (via drill 1.02)
  other vias: 43.79,42.8
S$753  (via drill 1.02)
  other vias: 43.79,40.26
S$754  (via drill 1.02)
  other vias: 43.79,37.72
S$755  (via drill 1.02)
  other vias: 43.79,35.18
S$756  (via drill 1.02)
  other vias: 43.79,32.64
S$757  (via drill 1.02)
  other vias: 43.79,30.1
S$758  (via drill 1.02)
  other vias: 43.79,27.56
S$759  (via drill 1.02)
  other vias: 43.79,25.02
S$760  (via drill 1.02)
  other vias: 43.79,22.48
S$761  (via drill 1.02)
  other vias: 43.79,19.94
S$762  (via drill 1.02)
  other vias: 43.79,17.4
S$763  (via drill 1.02)
  other vias: 43.79,14.86
S$764  (via drill 1.02)
  other vias: 43.79,12.32
S$765  (via drill 1.02)
  other vias: 43.79,9.78
S$766  (via drill 1.02)
  other vias: 43.79,7.24
S$767  (via drill 1.02)
  other vias: 43.79,4.7
S$768  (via drill 1.02)
  other vias: 43.79,2.16
S$769  (via drill 1.02)
  other vias: 48.87,47.88
S$770  (via drill 1.02)
  other vias: 48.87,45.34
S$771  (via drill 1.02)
  other vias: 48.87,42.8
S$772  (via drill 1.02)
  other vias: 48.87,40.26
S$773  (via drill 1.02)
  other vias: 48.87,37.72
S$774  (via drill 1.02)
  other vias: 48.87,35.18
S$775  (via drill 1.02)
  other vias: 48.87,32.64
S$776  (via drill 1.02)
  other vias: 48.87,30.1
S$777  (via drill 1.02)
  other vias: 48.87,27.56
S$778  (via drill 1.02)
  other vias: 48.87,25.02
S$779  (via drill 1.02)
  other vias: 48.87,22.48
S$780  (via drill 1.02)
  other vias: 48.87,19.94
S$781  (via drill 1.02)
  other vias: 48.87,17.4
S$782  (via drill 1.02)
  other vias: 48.87,14.86
S$783  (via drill 1.02)
  other vias: 48.87,12.32
S$784  (via drill 1.02)
  other vias: 48.87,9.78
S$785  (via drill 1.02)
  other vias: 48.87,7.24
S$786  (via drill 1.02)
  other vias: 48.87,4.7
S$787  (via drill 1.02)
  other vias: 48.87,2.16
S$788  (via drill 1.02)
  other vias: 46.33,47.88
S$789  (via drill 1.02)
  other vias: 46.33,45.34
S$790  (via drill 1.02)
  other vias: 46.33,42.8
S$791  (via drill 1.02)
  other vias: 46.33,40.26
S$792  (via drill 1.02)
  other vias: 46.33,37.72
S$793  (via drill 1.02)
  other vias: 46.33,35.18
S$794  (via drill 1.02)
  other vias: 46.33,32.64
S$795  (via drill 1.02)
  other vias: 46.33,30.1
S$796  (via drill 1.02)
  other vias: 46.33,27.56
S$797  (via drill 1.02)
  other vias: 46.33,25.02
S$798  (via drill 1.02)
  other vias: 46.33,22.48
S$799  (via drill 1.02)
  other vias: 46.33,19.94
S$800  (via drill 1.02)
  other vias: 46.33,17.4
S$801  (via drill 1.02)
  other vias: 46.33,14.86
S$802  (via drill 1.02)
  other vias: 46.33,12.32
S$803  (via drill 1.02)
  other vias: 46.33,9.78
S$804  (via drill 1.02)
  other vias: 46.33,7.24
S$805  (via drill 1.02)
  other vias: 46.33,4.7
S$806  (via drill 1.02)
  other vias: 46.33,2.16
S$807  (via drill 1.02)
  other vias: 51.41,47.88
S$808  (via drill 1.02)
  other vias: 51.41,45.34
S$809  (via drill 1.02)
  other vias: 51.41,42.8
S$810  (via drill 1.02)
  other vias: 51.41,40.26
S$811  (via drill 1.02)
  other vias: 51.41,37.72
S$812  (via drill 1.02)
  other vias: 51.41,35.18
S$813  (via drill 1.02)
  other vias: 51.41,32.64
S$814  (via drill 1.02)
  other vias: 51.41,30.1
S$815  (via drill 1.02)
  other vias: 51.41,27.56
S$816  (via drill 1.02)
  other vias: 51.41,25.02
S$817  (via drill 1.02)
  other vias: 51.41,22.48
S$818  (via drill 1.02)
  other vias: 51.41,19.94
S$819  (via drill 1.02)
  other vias: 51.41,17.4
S$820  (via drill 1.02)
  other vias: 51.41,14.86
S$821  (via drill 1.02)
  other vias: 51.41,12.32
S$822  (via drill 1.02)
  other vias: 51.41,9.78
S$823  (via drill 1.02)
  other vias: 51.41,7.24
S$824  (via drill 1.02)
  other vias: 51.41,4.7
S$825  (via drill 1.02)
  other vias: 51.41,2.16
S$826  (via drill 1.02)
  other vias: 53.95,47.88
S$827  (via drill 1.02)
  other vias: 53.95,45.34
S$828  (via drill 1.02)
  other vias: 53.95,42.8
S$829  (via drill 1.02)
  other vias: 53.95,40.26
S$830  (via drill 1.02)
  other vias: 53.95,37.72
S$831  (via drill 1.02)
  other vias: 53.95,35.18
S$832  (via drill 1.02)
  other vias: 53.95,32.64
S$833  (via drill 1.02)
  other vias: 53.95,30.1
S$834  (via drill 1.02)
  other vias: 53.95,27.56
S$835  (via drill 1.02)
  other vias: 53.95,25.02
S$836  (via drill 1.02)
  other vias: 53.95,22.48
S$837  (via drill 1.02)
  other vias: 53.95,19.94
S$838  (via drill 1.02)
  other vias: 53.95,17.4
S$839  (via drill 1.02)
  other vias: 53.95,14.86
S$840  (via drill 1.02)
  other vias: 53.95,12.32
S$841  (via drill 1.02)
  other vias: 53.95,9.78
S$842  (via drill 1.02)
  other vias: 53.95,7.24
S$843  (via drill 1.02)
  other vias: 53.95,4.7
S$844  (via drill 1.02)
  other vias: 53.95,2.16
S$845  (via drill 1.02)
  other vias: 56.49,47.88
S$846  (via drill 1.02)
  other vias: 56.49,45.34
S$847  (via drill 1.02)
  other vias: 56.49,42.8
S$848  (via drill 1.02)
  other vias: 56.49,40.26
S$849  (via drill 1.02)
  other vias: 56.49,37.72
S$850  (via drill 1.02)
  other vias: 56.49,35.18
S$851  (via drill 1.02)
  other vias: 56.49,32.64
S$852  (via drill 1.02)
  other vias: 56.49,30.1
S$853  (via drill 1.02)
  other vias: 56.49,27.56
S$854  (via drill 1.02)
  other vias: 56.49,25.02
S$855  (via drill 1.02)
  other vias: 56.49,22.48
S$856  (via drill 1.02)
  other vias: 56.49,19.94
S$857  (via drill 1.02)
  other vias: 56.49,17.4
S$858  (via drill 1.02)
  other vias: 56.49,14.86
S$859  (via drill 1.02)
  other vias: 56.49,12.32
S$860  (via drill 1.02)
  other vias: 56.49,9.78
S$861  (via drill 1.02)
  other vias: 56.49,7.24
S$862  (via drill 1.02)
  other vias: 56.49,4.7
S$863  (via drill 1.02)
  other vias: 56.49,2.16
S$864  (via drill 1.02)
  other vias: 59.03,47.88
S$865  (via drill 1.02)
  other vias: 59.03,45.34
S$866  (via drill 1.02)
  other vias: 59.03,42.8
S$867  (via drill 1.02)
  other vias: 59.03,40.26
S$868  (via drill 1.02)
  other vias: 59.03,37.72
S$869  (via drill 1.02)
  other vias: 59.03,35.18
S$870  (via drill 1.02)
  other vias: 59.03,32.64
S$871  (via drill 1.02)
  other vias: 59.03,30.1
S$872  (via drill 1.02)
  other vias: 59.03,27.56
S$873  (via drill 1.02)
  other vias: 59.03,25.02
S$874  (via drill 1.02)
  other vias: 59.03,22.48
S$875  (via drill 1.02)
  other vias: 59.03,19.94
S$876  (via drill 1.02)
  other vias: 59.03,17.4
S$877  (via drill 1.02)
  other vias: 59.03,14.86
S$878  (via drill 1.02)
  other vias: 59.03,12.32
S$879  (via drill 1.02)
  other vias: 59.03,9.78
S$880  (via drill 1.02)
  other vias: 59.03,7.24
S$881  (via drill 1.02)
  other vias: 59.03,4.7
S$882  (via drill 1.02)
  other vias: 59.03,2.16
S$883  (via drill 1.02)
  other vias: 61.57,47.88
S$884  (via drill 1.02)
  other vias: 61.57,45.34
S$885  (via drill 1.02)
  other vias: 61.57,42.8
S$886  (via drill 1.02)
  other vias: 61.57,40.26
S$887  (via drill 1.02)
  other vias: 61.57,37.72
S$888  (via drill 1.02)
  other vias: 61.57,35.18
S$889  (via drill 1.02)
  other vias: 61.57,32.64
S$890  (via drill 1.02)
  other vias: 61.57,30.1
S$891  (via drill 1.02)
  other vias: 61.57,27.56
S$892  (via drill 1.02)
  other vias: 61.57,25.02
S$893  (via drill 1.02)
  other vias: 61.57,22.48
S$894  (via drill 1.02)
  other vias: 61.57,19.94
S$895  (via drill 1.02)
  other vias: 61.57,17.4
S$896  (via drill 1.02)
  other vias: 61.57,14.86
S$897  (via drill 1.02)
  other vias: 61.57,12.32
S$898  (via drill 1.02)
  other vias: 61.57,9.78
S$899  (via drill 1.02)
  other vias: 61.57,7.24
S$900  (via drill 1.02)
  other vias: 61.57,4.7
S$901  (via drill 1.02)
  other vias: 61.57,2.16
S$902  (via drill 1.02)
  other vias: 64.11,47.88
S$903  (via drill 1.02)
  other vias: 64.11,45.34
S$904  (via drill 1.02)
  other vias: 64.11,42.8
S$905  (via drill 1.02)
  other vias: 64.11,40.26
S$906  (via drill 1.02)
  other vias: 64.11,37.72
S$907  (via drill 1.02)
  other vias: 64.11,35.18
S$908  (via drill 1.02)
  other vias: 64.11,32.64
S$909  (via drill 1.02)
  other vias: 64.11,30.1
S$910  (via drill 1.02)
  other vias: 64.11,27.56
S$911  (via drill 1.02)
  other vias: 64.11,25.02
S$912  (via drill 1.02)
  other vias: 64.11,22.48
S$913  (via drill 1.02)
  other vias: 64.11,19.94
S$914  (via drill 1.02)
  other vias: 64.11,17.4
S$915  (via drill 1.02)
  other vias: 64.11,14.86
S$916  (via drill 1.02)
  other vias: 64.11,12.32
S$917  (via drill 1.02)
  other vias: 64.11,9.78
S$918  (via drill 1.02)
  other vias: 64.11,7.24
S$919  (via drill 1.02)
  other vias: 64.11,4.7
S$920  (via drill 1.02)
  other vias: 64.11,2.16
SIDE1  (15 unrouted)
SIDE2  (15 unrouted)
SIDE3  (15 unrouted)
SIDE4  (15 unrouted)

## Text on the board
tPlace: 50mm × 70mm, M3 holes | 50mm × 70mm, M3 holes